# EAGLE board adns_5050_breakout_v9 (EAGLE 9.7.0)
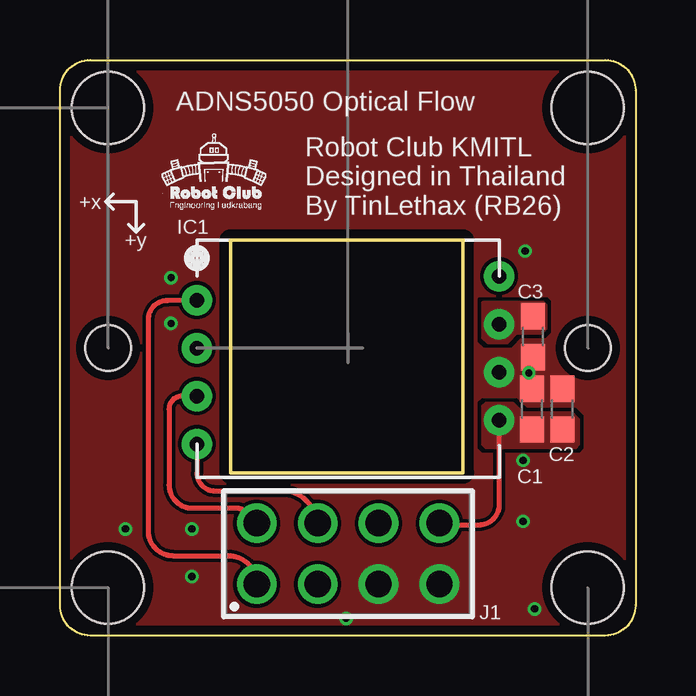
[diagram p0: board, top side]
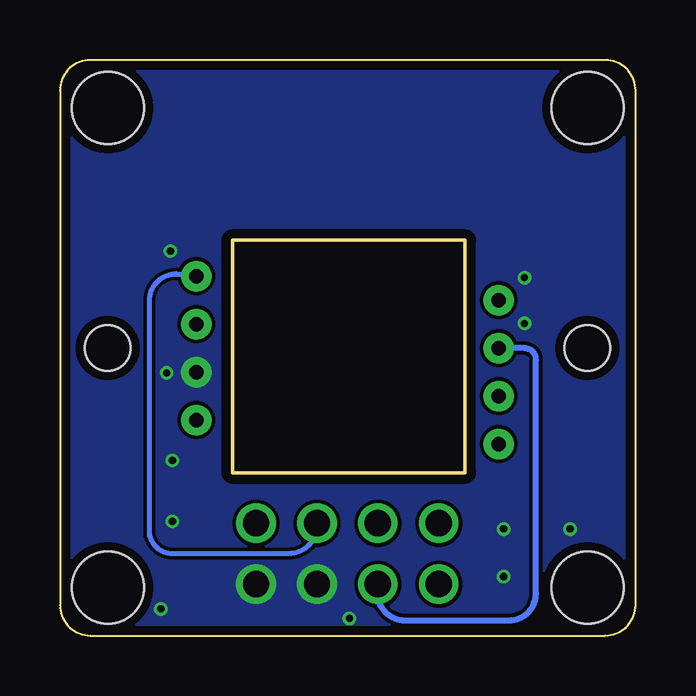
[diagram p1: board, bottom side, seen from below]

Size 24 x 24 mm. Coordinates in mm from the lower left corner, seen from the top.
Outline: 0,1.27 0,22.73 arc-90 1.27,24 22.73,24 arc-90 24,22.73 24,1.27 arc-90 22.73,0 1.27,0 arc-90 0,1.27
Copper layers (1*16): Top 0.035559375mm / dielectric 1.6mm / Bottom 0.035559375mm
Design rules "oshpark-2layer": minimum track width 6mil, minimum drill 10mil, track to track 6mil, track to pad 6mil, pad to pad 6mil, via to via 6mil, smd to smd 6mil, copper to edge 15mil, drill to drill 6mil, minimum pad ring 5mil, minimum via ring 5mil, stop-mask expansion 2.5mil, vias tented up to drill 0mil, thermal gap 10mil
Holes 1.9 mm at 22.01,11.98 2.01,11.98
Holes 3 mm at 2,2 22,2 2,22 22,22

## Footprints (pad centres in the part's own frame; a part is rotated, then mirrored left to right if it is on the bottom)
C0603 = smd 1.1 x 1: 1 -0.85,0; 2 0.85,0
WEIRD_DIP8 = drill 0.6 pad 1.27: P$1 -6.3,2; P$2 -6.3,0; P$3 -6.3,-2; P$4 -6.3,-4; P$5 6.3,-3; P$6 6.3,-1; P$7 6.3,1; P$8 6.3,3
61300821121 = drill 1.1: 1 -3.81,-1.27; 2 -3.81,1.27; 3 -1.27,-1.27; 4 -1.27,1.27; 5 1.27,-1.27; 6 1.27,1.27; 7 3.81,-1.27; 8 3.81,1.27

## Placement (x,y rotation side)
C1  0.1uF  [C0603]  19.68,9.44 90 top
C2  4.7uF  [C0603]  20.94,9.44 90 top
C3  0.1uF  [C0603]  19.71,12.46 270 top
IC1  ADNS5050  [WEIRD_DIP8]  12.01,11.98 0 top
J1  61300821121  [61300821121]  12.01,3.41 0 top

## Library data of the parts
C1-C3 = adafruit
IC1 = adns_5050
J1 = Wurth_Connectors_WR-PHD; DATASHEET-URL: https://www.we-online.com/catalog/datasheet/61300821121.pdf; GENDER: Pin Header; IR: 3A; MOUNT: THT; PACKAGING: Bag; PART-NUMBER: 61300821121; PINS: 8; PITCH: 2.54mm; ROWS: Dual; TYPE: Board Stacker

## Nets
GND: C1.2 C2.2 C3.2 IC1.P$6 J1.5 J1.7
LED_OD: IC1.P$2 J1.3
NCS: IC1.P$4 J1.4
REGO: C3.1 IC1.P$7
RST: IC1.P$3 J1.2
SCLK: IC1.P$8 J1.6
SDIO: IC1.P$1 J1.1
VCC: C1.1 C2.1 IC1.P$5 J1.8

## Tracks (layer width: path | path; a pad name or v marks a point on that pad's centre or on a via)
GND  (via drill 0.3)
  other vias: 19.55,10.95 19.31,7.3 19.31,4.76 19.79,1.11 5.5,4.44 5.5,2.46 11.93,0.71 2.73,4.44 4.63,13.02 4.63,14.92 19.39,16.03
  pour Top (rank 6, no thermals): 0.02,0.15 24,0.15 24,23.89 0.02,23.89
  pour Bottom (rank 6, no thermals): 0.02,0.15 24,0.15 24,23.89 0.02,23.89
LED_OD
  Bottom 0.254: J1.3 10.74,1.75 arc-90 9.63,0.63 5.27,0.63 arc-90 4.15,1.75 4.15,11.51 arc-90 4.63,11.98 IC1.P$2
NCS
  Top 0.203: IC1.P$4 5.71,6.78 arc90 6.46,6.03 9.31,6.03 arc-90 10.66,4.68 J1.4
REGO
  pour Top (no thermals): 19.03,12.6 19.06,12.62 20.08,12.62 20.27,12.81 20.27,13.78 20.16,13.89 17.64,13.89 17.64,12.41 17.84,12.22 18.65,12.22
RST
  Top 0.203: IC1.P$3 5.09,9.98 arc90 4.55,9.44 4.55,6.27 arc90 5.5,5.32 7.33,5.32 arc-90 8.08,4.56 arc-90 J1.2
SCLK
  Bottom 0.203: J1.6 13.28,4.6 arc90 14.47,3.41 19.32,3.41 arc90 20.27,4.36 20.27,13.97 arc90 19.16,15.08 18.41,15.08 arc90 IC1.P$8
SDIO
  Top 0.203: IC1.P$1 arc-90 5.7,13.97 4.47,13.97 arc90 3.68,13.18 3.68,4.36 arc90 4.71,3.33 7.01,3.33 arc-90 J1.1
VCC
  Top 0.203: 18.28,8.96 arc-90 IC1.P$5 18.31,5.45 arc-90 17.46,4.6 15.9,4.6 arc-90 J1.8
  pour Top (no thermals): 21.62,9.02 21.35,9.29 19.3,9.29 19.27,9.3 18.89,9.69 17.76,9.69 17.64,9.57 17.64,7.97 17.76,7.85 21.51,7.85 21.62,7.97

## Text on the board
tPlace: ADNS5050 Optical Flow | +x | Robot Club KMITL / Designed in Thailand / By TinLethax (RB26) | +y